# EAGLE board Kreuzung (EAGLE 7.6.0)

Size 56.82 x 53.33 mm. Coordinates in mm from the lower left corner, seen from the top.
Outline: 0,0 56.82,0 56.82,53.33 0,53.33 0,0
Copper layers (1*16): Top 0.035mm / dielectric 1.5mm / Bottom 0.035mm
Design rules "default": minimum track width 10mil, minimum drill 24mil, track to track 8mil, track to pad 8mil, pad to pad 8mil, via to via 8mil, smd to smd 8mil, copper to edge 40mil, drill to drill 8mil, minimum pad ring 10mil, minimum via ring 8mil, stop-mask expansion 4mil, vias tented up to drill 0mil, thermal gap 10mil

## Footprints (pad centres in the part's own frame; a part is rotated, then mirrored left to right if it is on the bottom)
LED5MM = drill 0.813 octagon: A -1.27,0; K 1.27,0
1X3P-2.54-2.54-11.6-3.0-BLACK-MALE = drill 0.889 pad 1.651 square: 1 0,2.54 | drill 0.889 pad 1.651: 2 0,0; 3 0,-2.54
0207/10 = drill 0.813 octagon: 1 -5.08,0; 2 5.08,0
TL1105 = drill 1 pad 1.676: 1 -2.25,3.25; 2 2.25,3.25; 3 -2.25,-3.25; 4 2.25,-3.25
DIL16 = drill 0.813 long: 1 -8.89,-3.81; 2 -6.35,-3.81; 3 -3.81,-3.81; 4 -1.27,-3.81; 5 1.27,-3.81; 6 3.81,-3.81; 7 6.35,-3.81; 8 8.89,-3.81; 9 8.89,3.81; 10 6.35,3.81; 11 3.81,3.81; 12 1.27,3.81; 13 -1.27,3.81; 14 -3.81,3.81; 15 -6.35,3.81; 16 -8.89,3.81

## Placement (x,y rotation side)
D1  [LED5MM]  5,10.08 0 top
D2  [LED5MM]  5,22.78 0 top
D3  [LED5MM]  5,35.48 0 top
D5  [LED5MM]  5,48.18 0 top
D6  [LED5MM]  5,137.08 0 top  (outside the outline)
D7  [LED5MM]  5,149.78 0 top  (outside the outline)
PIR1  [1X3P-2.54-2.54-11.6-3.0-BLACK-MALE]  5,187.88 0 top  (outside the outline)
PIR2  [1X3P-2.54-2.54-11.6-3.0-BLACK-MALE]  5,200.58 0 top  (outside the outline)
R1  1k‎Ω  [0207/10]  5,60.88 0 top  (outside the outline)
R2  1k‎Ω  [0207/10]  5,73.58 0 top  (outside the outline)
R3  1k‎Ω  [0207/10]  5,86.28 0 top  (outside the outline)
R4  1k‎Ω  [0207/10]  5,98.98 0 top  (outside the outline)
R5  1k‎Ω  [0207/10]  5,162.48 0 top  (outside the outline)
R6  1k‎Ω  [0207/10]  5,175.18 0 top  (outside the outline)
R7  1k‎Ω  [0207/10]  5,225.98 0 top  (outside the outline)
R8  1k‎Ω  [0207/10]  5,238.68 0 top  (outside the outline)
S1  [TL1105]  5,111.68 0 top  (outside the outline)
S2  [TL1105]  5,124.38 0 top  (outside the outline)
U1  [DIL16]  5,213.28 0 top  (outside the outline)

## Library data of the parts
D1-D3 D5-D7 PIR1 PIR2 R1-R8 S1 S2 U1 = AUTODESK_CIRCUITS_BREADBOARD

## Nets
N$1: D3.A R4.2
N$2: D5.A R3.2
N$3: D2.A R2.2
N$4: D1.A R1.2
N$5: R7.2 S1.4 U1.12
N$6: S1.2
N$7: S1.3 S2.4
N$8: S2.2
N$9: S2.1
N$10: R8.2 S2.3 U1.13
N$11: D1.K D2.K D3.K D5.K D7.K
N$12: D7.A R6.2
N$13: D6.K
N$14: D6.A R5.2
N$15: R5.1 U1.6
N$16: R6.1 U1.1
N$17: R2.1 U1.2
N$18: R1.1 U1.3
N$19: R3.1 U1.4
N$20: R4.1 U1.5
N$21: PIR1.2 U1.7
N$22: PIR2.2 U1.8
N$23: S1.1
N$24: R7.1 R8.1

## Tracks (layer width: path | path; a pad name or v marks a point on that pad's centre or on a via)
N$1  (1 unrouted)
N$2  (1 unrouted)
N$3  (1 unrouted)
N$4  (1 unrouted)
N$5  (2 unrouted)
N$7  (1 unrouted)
N$10  (2 unrouted)
N$11  (4 unrouted)
N$12  (1 unrouted)
N$14  (1 unrouted)
N$15  (1 unrouted)
N$16  (1 unrouted)
N$17  (1 unrouted)
N$18  (1 unrouted)
N$19  (1 unrouted)
N$20  (1 unrouted)
N$21  (1 unrouted)
N$22  (1 unrouted)
N$24  (1 unrouted)